# Altium PCB Low_pass_filter_PCB.PcbDoc
Units mil, origin at the board's own origin, x right, y up, seen from the top; angles counter-clockwise.
Board outline 6000 x 4000 mil, 2 copper layers (Top Layer, Bottom Layer); 13 components, 10 nets, 32 pads, 0 vias.
Unrouted connection lines stored in the file: 19.
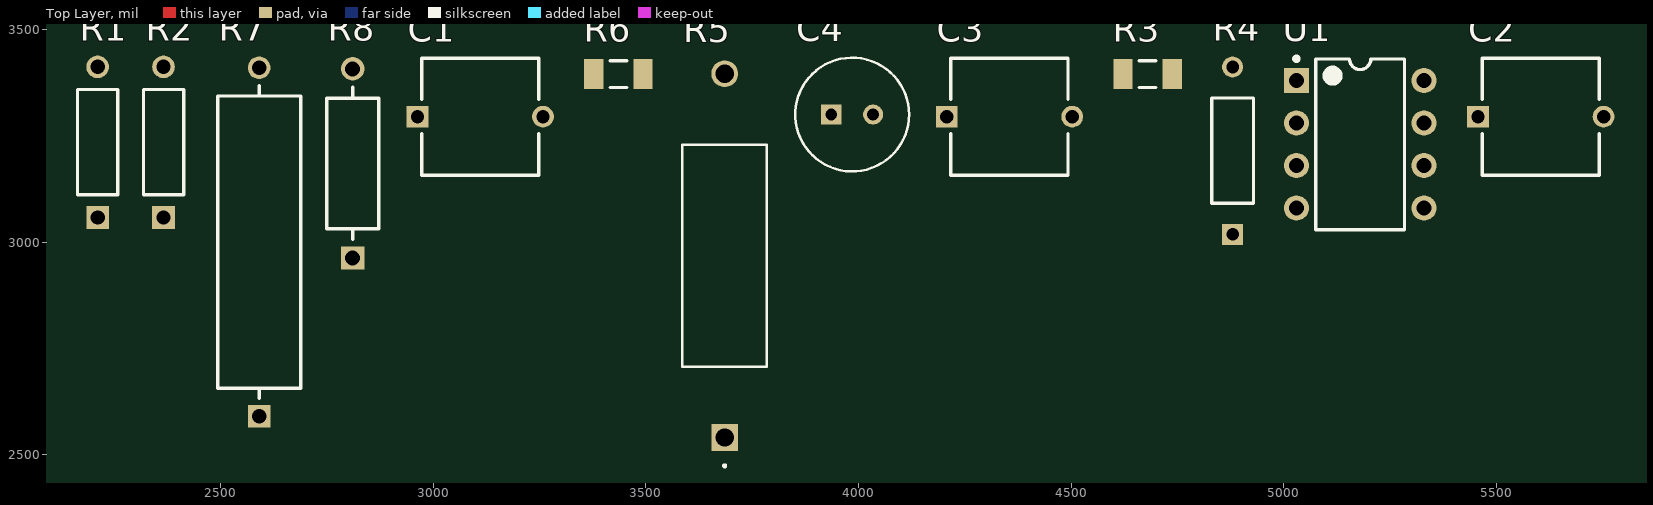
[diagram p0: Top Layer view]
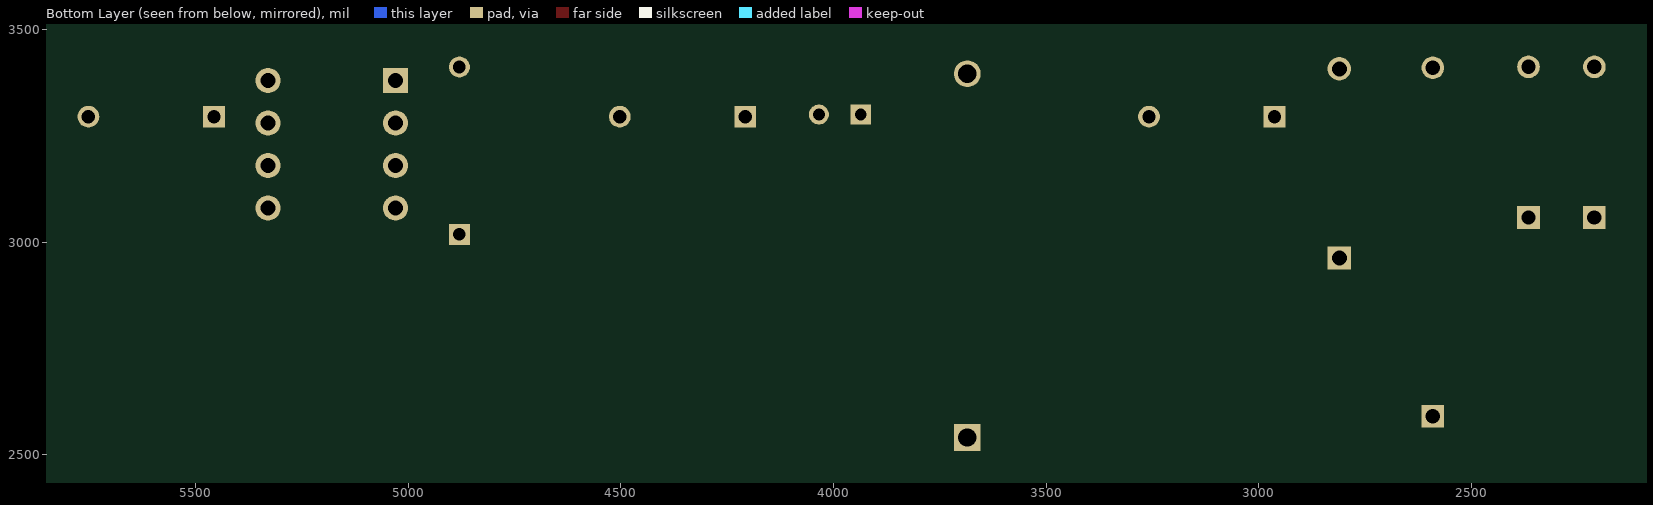
[diagram p1: Bottom Layer view, seen from below]

## Layer stack, top to bottom
Top Solder: solder mask 0.4, Solder Resist, Dk 3.5
Top Layer: signal copper 1.4
Dielectric 1: dielectric 12.6, FR-4, Dk 4.8
Bottom Layer: signal copper 1.4
Bottom Solder: solder mask 0.4, Solder Resist, Dk 3.5

## Board outline
1000,1000 7000,1000 7000,5000 1000,5000

## Design rules (kind name [scope] priority, off if disabled: settings)
Clearance [All] p1: gap=10 ignorepadtopadclearanceinfootprint=FALSE
PolygonConnect [All] p1: connectstyle=Relief reliefconductorwidth=10 reliefentries=4 polygonreliefangle="90 Angle" airgapwidth=10
RoutingVias [All] p1: holewidth=28 width=50 viastyle="Through Hole" minholewidth=28 minwidth=50 maxholewidth=28 maxwidth=50
SolderMaskExpansion [All] p1: expansion=4 istentingtop=FALSE
Width [All] p1: maxlimit=10 minlimit=10 preferedwidth=10
30 further rules are at their usual default settings.

## Components (designator, comment, footprint, x,y, rotation, side; value= is the part's Value field where it differs from the comment)
C1 "DE6E3KJ102MN3A" FP-DE6_D7_T7_F7_5_d0_6-0-MFG 3110,3295 r0 top
C2 "DE6E3KJ102MN3A" FP-DE6_D7_T7_F7_5_d0_6-0-MFG 5605,3295 r0 top
C3 "DE6E3KJ102MN3A" FP-DE6_D7_T7_F7_5_d0_6-0-MFG 4355,3295 r0 top
C4 "ECA1CEN470" FP-RAD-TH-D_6_3_0_5-L_11-MFG 3985,3300 r0 top
R1 "MFR-25FBF52-1K" RESA60-630X240 2210,3235 r90 top
R2 "MFR-25FBF52-1K" RESA60-630X240 2365,3235 r90 top
R3 "SG73S2BTTD2402F" RESC3216X70X40NL20T20 4680,3395 r0 top
R4 "MBB02070C1002FCT00" FP-MBB0207-MFG 4880,3215 r90 top
R5 "AC03000002400JAC00" RES_AC03_VIS 3685,2540 r90 top
R6 "SG73S2BTTD2402F" RESC3216X70X40NL20T20 3435,3395 r0 top
R7 "RNC65H3011FRB14" FP-RNC65-MFG 2590,3000 r90 top value=3.01kΩ
R8 "RR01J100KTB" FP-RR01-MFG 2810,3185 r90 top
U1 "LM741CN/NOPB" P0008A 5180,3230 r0 top

## Footprints (in the part's own frame and the unit in brackets; to place one, negate y for a bottom-side part, rotate by r counter-clockwise, add the part's x,y. Pads: shape width x height; smd on the part's side, far side on the other; paste and mask are expansions set on the pad)
FP-DE6_D7_T7_F7_5_d0_6-0-MFG [mm]
  rect 1.3x1.3 hole 0.8 paste-2539.97 mask+0: 1(-3.75,0)
  round 1.3 hole 0.8 paste-2539.97 mask+0: 2(3.75,0)
  silkscreen extent -3.5,-3.5 3.5,3.5, body extent -4.5,-3.6 4.5,3.6, height 0.25
FP-MBB0207-MFG [mm]
  rect 1.25x1.25 hole 0.75 paste-2539.97 mask+0: 1(-5,0)
  round 1.25 hole 0.75 paste-2539.97 mask+0: 2(5,0)
  silkscreen extent -3.15,-1.25 3.15,1.25, body extent -5.72,-1.35 5.72,1.35, height 0.25
FP-RAD-TH-D_6_3_0_5-L_11-MFG [mm]
  rect 1.2x1.2 hole 0.7 paste-2539.97 mask+0: 1(-1.25,0)
  round 1.2 hole 0.7 paste-2539.97 mask+0: 2(1.25,0)
  silkscreen extent -3.4,-3.4 3.4,3.4, body extent -3.5,-3.5 3.5,3.5, height 0.25
FP-RNC65-MFG [mm]
  rect 1.35x1.35 hole 0.85 paste-2539.97 mask+0: 1(-10.415,0)
  round 1.35 hole 0.85 paste-2539.97 mask+0: 2(10.415,0)
  silkscreen extent -9.34,-2.47 9.34,2.47, body extent -11.19,-2.58 11.19,2.58, height 0.25
FP-RR01-MFG [mm]
  rect 1.4x1.4 hole 0.9 paste-2539.97 mask+0: 1(-5.65,0)
  round 1.4 hole 0.9 paste-2539.97 mask+0: 2(5.65,0)
  silkscreen extent -4.55,-1.55 4.55,1.55, body extent -6.45,-1.65 6.45,1.65, height 0.25
P0008A [mm] "DIP, 8-Leads, Body 10.15x6.6mm, Pitch 2.54mm"
  rect 1.5x1.5 hole 0.9: 1(-3.81,3.81)
  round 1.5 hole 0.9: 2(-3.81,1.27) 3(-3.81,-1.27) 4(-3.81,-3.81) 5(3.81,-3.81) 6(3.81,-1.27) 7(3.81,1.27) 8(3.81,3.81)
  silkscreen extent -3.93,-5.1 2.65,5.23, body extent -3.95,-5.07 3.95,5.07, height 5.08
RES_AC03_VIS [mil]
  rect 63x63 / inner round 60 / far side rect 63x63 hole 43 paste-99999 mask+0: 1(0,0)
  round 63 / inner round 60 / far side round 63 hole 43 paste-99999 mask+0: 2(856,0)
  silkscreen extent -69,-99 689,100, body extent -16,-95 873,95, height 189
RESA60-630X240 [mm] "Axial Resistor, 2-Leads, Dia 2.4mm, Body Length 6.3mm"
  rect 1.35x1.35 hole 0.85: 1(-4.5,0)
  round 1.35 hole 0.85: 2(4.5,0)
  silkscreen extent -3.15,-1.2 3.15,1.2, body extent -3.15,-1.2 3.15,1.2, height 2.4
RESC3216X70X40NL20T20 [mm] "Chip Resistor, 2-Leads, Body 3.20x1.60mm, IPC Medium Density"
  rect 1.15x1.8 smd: 1(-1.475,0) 2(1.475,0)
  silkscreen extent -0.5,-0.8 0.5,0.8, body extent -1.7,-0.9 1.7,0.9, height 0.7

## Part data
C1 C2 C3: library part CMP-06035-062244-1, "CAP CER 1000PF 300VAC RADIAL", Capacitance=1nF, Case/Package=Radial, Max Operating Temperature=125°C, Min Operating Temperature=-25°C, Package Quantity=700, Ratings=AEC-Q200, Resistor Type=Ceramic, Tolerance=20%, Voltage Rating (AC)=300V, Depth=7mm, Height - Seated (Max)=0.394inch, Lead Diameter=0.6mm, Lead Pitch=7.5mm, Lead/Base Style="Formed Leads", Material=Ceramic, Mount="Through Hole", Packaging=Bulk, REACH SVHC="No SVHC", RoHS Compliant=Yes, Series=KJ, Termination=Radial, Width=7mm
C4: library part CMP-05427-001931-1, "Aluminum Electrolytic Capacitors (Radial Lead Type) 47uF ±20% 16V", Capacitance=47uF, Case/Package=Radial, Max Operating Temperature=105°C, Min Operating Temperature=-40°C, Package Quantity=200, Ripple Current=100mA, Tolerance=20%, Voltage Rating (DC)=16V, Lead Pitch=2.5mm, Lead/Base Style=Straight, Mount="Through Hole", Packaging="Ammo Pack", RoHS Compliant=Yes, Series=GA, Termination=Radial
R1 R2: library part CMP-1659-00075-1, "Axial Resistor, 1 KOhm, +/- 1%, 250 mW, -55 to 155 degC, 2-Pin THD, RoHS, Bulk", Case\Package=Axial, Max Operating Temperature="155 degC", Min Operating Temperature="-55 degC", Package Quantity=200, Power Rating="250 mW", Resistance="10 kohm", Tolerance=1%, Voltage Rating="250 V", ComponentLink1Description="Manufacturer URL", ComponentLink1URL=http://www.yageo.com/, ComponentLink2Description=Datasheet, ComponentLink2URL=http://www.yageo.com/documents/recent/Yageo%20LR_MFR_2013.pdf, DatasheetVersion=Apr-13, Length="0.248 inch", PackageDescription="2-Pin Axial Lead, Dia 2.4 mm, Body Length 6.3 mm", PackageReference=MFR-25, Packaging=Bulk, RoHSCompliant=true
R3 R6: library part CMP-2003-01687-1, Manufacturer="KOA Speer", Part Number=SG73S2BTTD2402F
R4: library part CMP-02408-000035-1, "RES 10K OHM 0.6W 1% AXIAL", Case/Package=Conformal, Max Operating Temperature=155°C, Max Power Dissipation=600mW, Min Operating Temperature=-55°C, Resistance=10kR, Resistance Tolerance=1%, Resistor Type="Metal Film", Temperature Coefficient=50ppm/°C, Voltage Rating=300V, Construction=Cylindrical, Contact Plating=Tin, Diameter=2.5mm, Features="Automotive AEC-Q200", Lead Free="Lead Free", Length=6.5mm, Military Standard=Not, Number of Terminations=2, Packaging="Tape and Reel", Power Rating=600mW, Radiation Hardening=No, RoHS Compliant=Yes, Series="MBB 0207 - Professional", Technology="THIN FILM", Termination=Axial, Tolerance=1%, Voltage Rating (DC)=300V
R5: library part CMP-00030-39746337-1, "AC03000002400JAC00 Resistor, 240 Ohm, ± 5%, 3 W, Axial Leaded, Wirewound, General Purpose", Case/Package=Axial, Max Operating Temperature=275°C, Max Power Dissipation=3W, Min Operating Temperature=0°C, Resistance=240Ω, Temperature Coefficient=-80ppm/°C, Tolerance=5%, Voltage Rating=27V, Composition=Wirewound, Contact Plating=Tin, Diameter=4.8mm, Features="Flame Retardant Coating", Lead Diameter=800µm, Length=13mm, Military Standard=Not, NexarPartId=39746337, Number of Pins=2, Number of Terminations=2, Packaging="Tape & Box (TB)", Power Rating=3W, Radiation Hardening=No, REACH SVHC=Unknown, RoHS=Compliant, Schedule B="8533210080, 8533210080", Termination=Axial, Thickness=4.8006mm, Voltage Rating (DC)=27V, Width=4.8mm
R7: library part CMP-02408-000008-1, "Res Metal Film 3.01K Ohm 1% 0.5W(1/2W) ±50ppm/C 0.01% Epoxy AXL T/R", Manufacturer=Vishay, Package=RNC65, Power Rating=0.5W, Resistance=3.01kΩ, Temperature="-65°C to +175°C", Temperature Coefficient=50ppm/°C, Temperature Range High=+175°C, Temperature Range Low=-65°C, Tolerance=1%, Voltage Rating=300V, Automotive=No, Category=Res, ComponentLink2Description=Datasheet, ComponentLink2URL=https://www.vishay.com/docs/31025/erc.pdf, Composition="Metal Film", Device Class L1="Passive Components", Device Class L2=Resistors, Device Class L3="Through-Hole Resistors", Height=4.95mm, Ipc Land Pattern Name=RESAD2083W85L1745D495, Lead Free=Yes, Manufacturer Part Number=RNC65H3011FRB14, Military Standard=true, Octopart=https://octopart.com/rnc65h3011frb14-vishay-40281131, RoHS=TRUE, Series=RNC
R8: library part CMP-03212-000008-1, "RES 100K OHM 5% 1W AXIAL", Case/Package=Metal, Max Operating Temperature=155°C, Min Operating Temperature=-55°C, Number of Resistors=1, Package Quantity=5000, Power Rating=1W, Resistance=100kR, Resistor Type="Power resistor", Temperature Coefficient=300ppm/°C, Tolerance=5%, Voltage Rating=350V, Diameter=2.6mm, ELV=Compliant, Length=6.8mm, Mount=Axial, Number of Terminations=2, Packaging="Ammo Pack", RoHS Compliant=Yes, Series=RR, Termination=Axial
U1: library part CMP-0055-00162-3, "Operational Amplifier, 8-pin MDIP, Pb-Free", Manufacturer="Texas Instruments", Package Reference=P0008A, PackageTopMarking=NSUZXYTTE#*LM*741CN, PowerWise=N, Code_JEDEC=MS-001-BA, ComponentLink1Description="Datasheet URL", ComponentLink1URL=http://www.ti.com/general/docs/lit/getliterature.tsp?genericPartNumber=LM741&fileType=pdf, CompType=Amplifiers, PackageDescription="MDIP, .365 x .250 x .130in, 8 Lead, .100in Pitch", PinCount=8, RoHS=Y

## Nets (pads, with @x,y where several pads share a name; then routed paths per layer and width w, separated by ;. In a path a pad name is that pad's centre, name@x,y a point inside that pad or via, vN(x,y) a via of type N, cw(c..) or ccw(c..) an arc to the next point about the centre after c; other vN are vias at no path point)
+5: R2.2 R3.1 U1.7
GND: C1.2 C3.2 R1.1 R6.1 U1.4
NetC1_1: C1.1 R1.2 R2.1 R7.1
NetC2_1: C2.1 R8.2 U1.6
NetC2_2: C2.2 R4.1 R5.2
NetC3_1: C3.1 R4.2 U1.2
NetC4_1: C4.1 R5.1
NetC4_2: C4.2
NetR3_2: R3.2 R6.2
NetR7_2: R7.2 R8.1 U1.3
pads on no net: U1.1 U1.5 U1.8